# EAGLE board mcu (EAGLE 9.4.2)
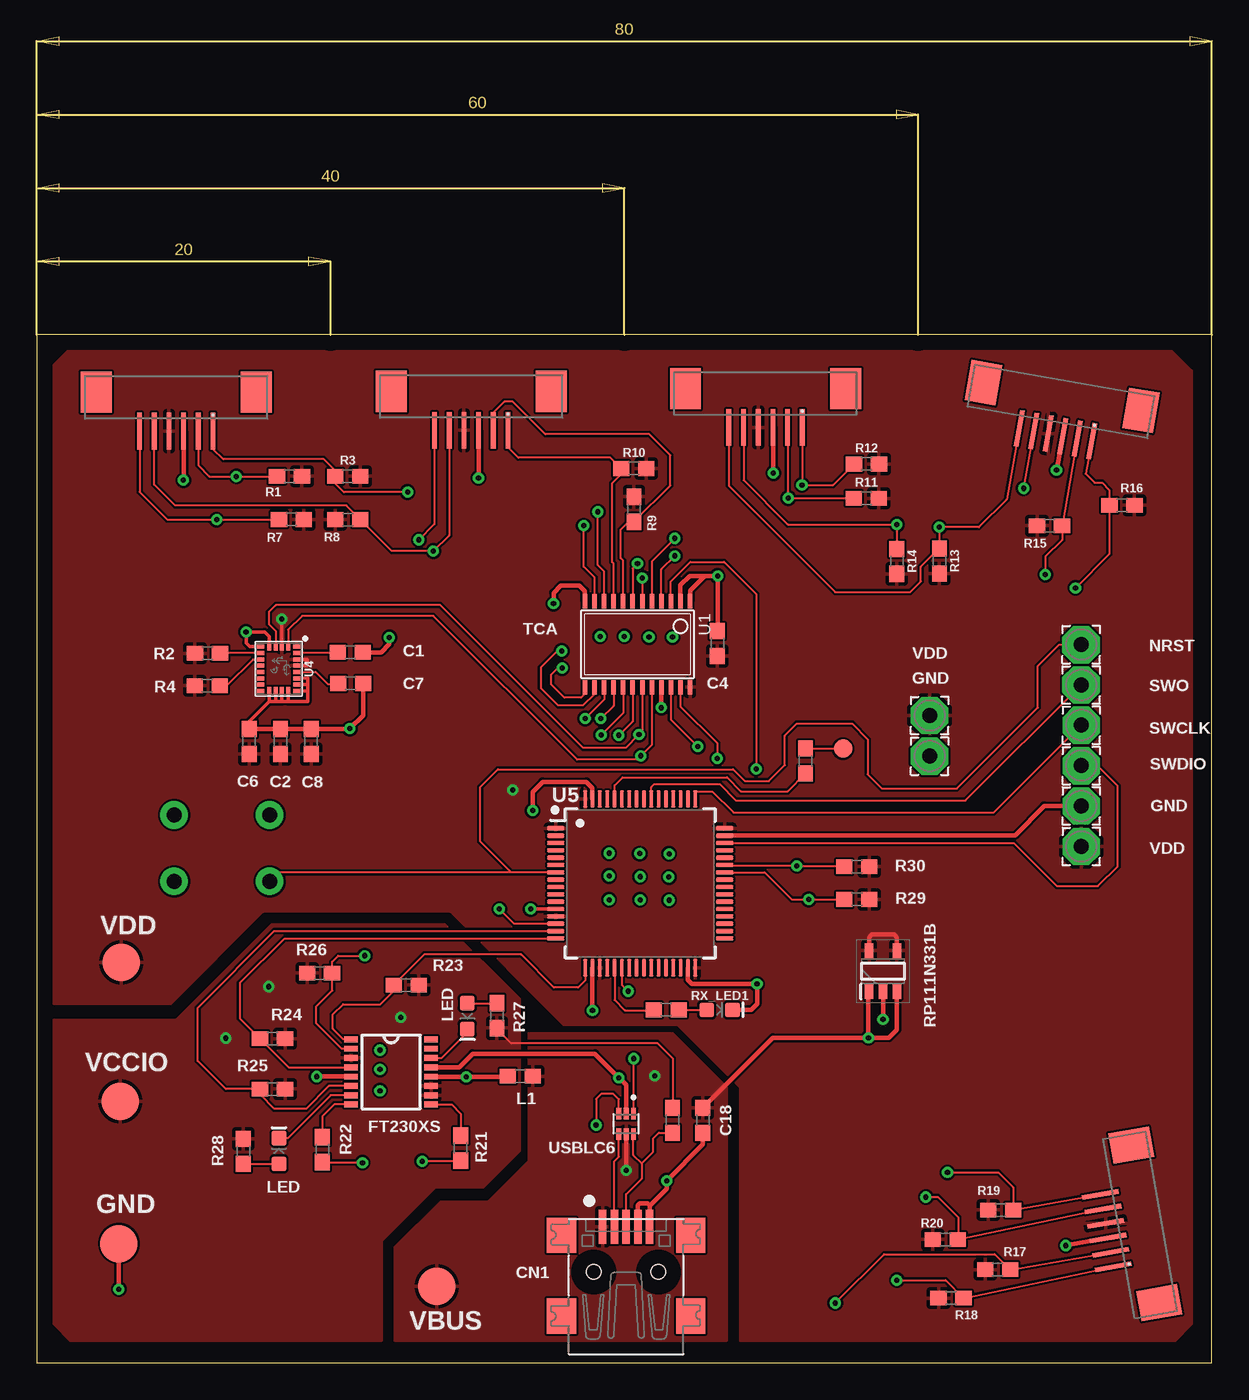
[diagram p0: board, top side]
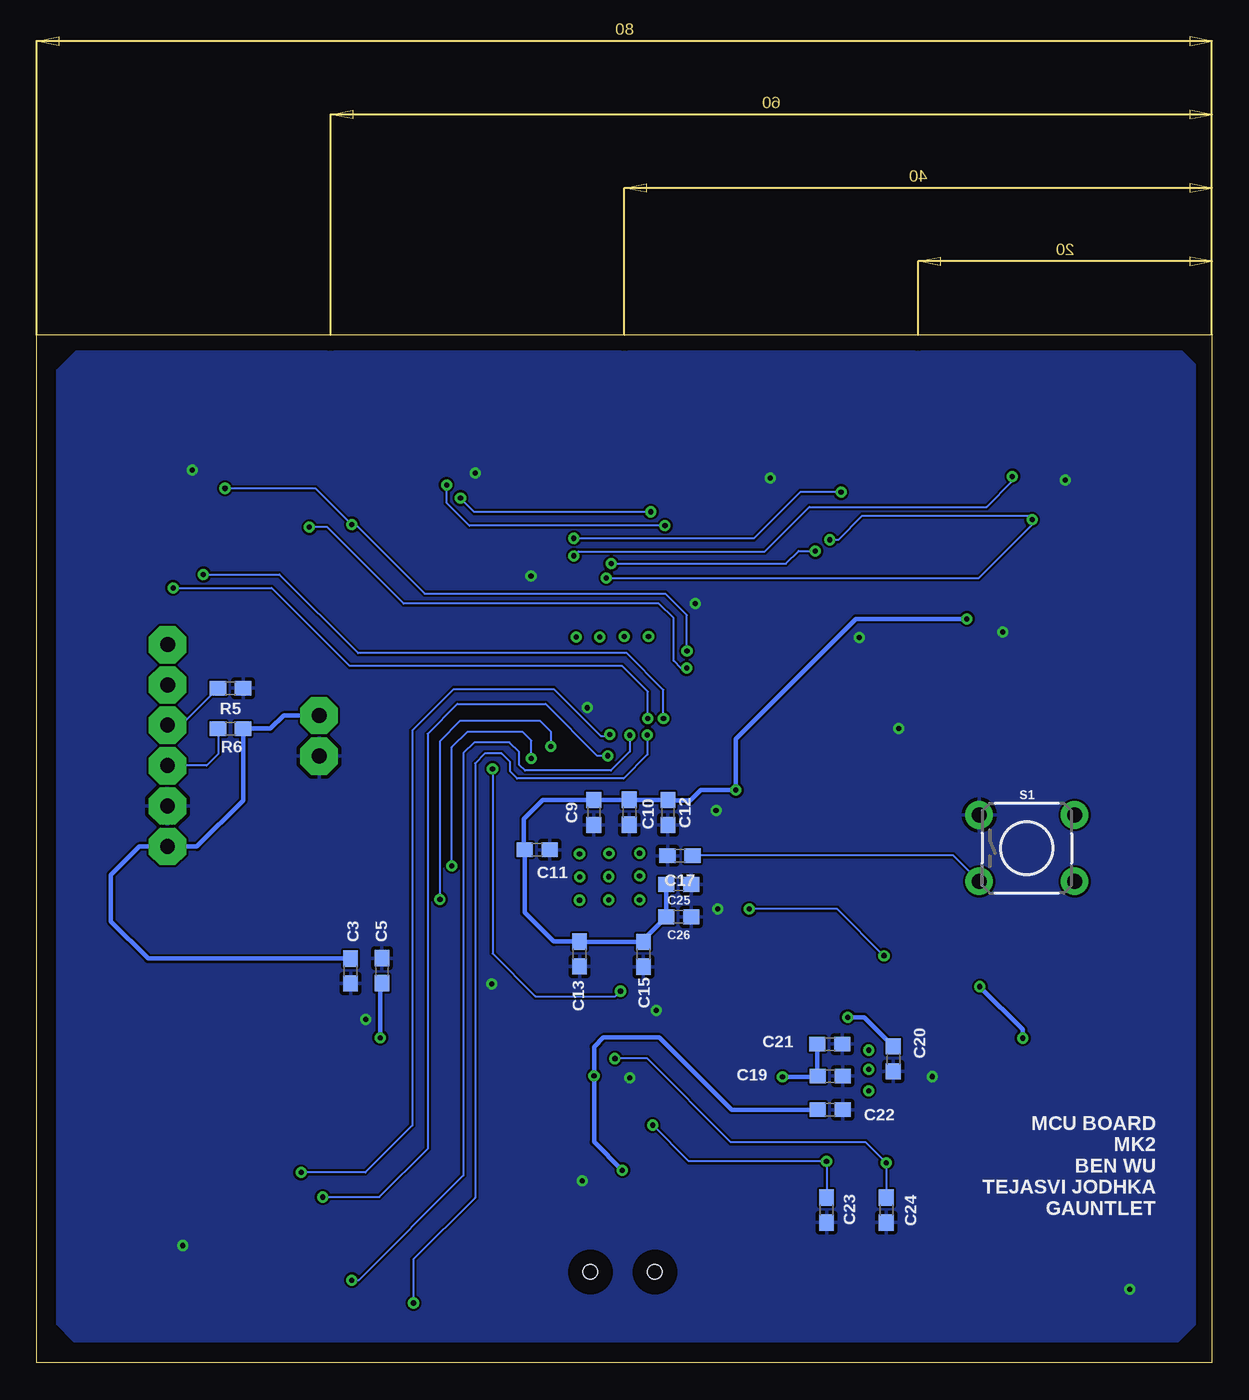
[diagram p1: board, bottom side, seen from below]

Size 80 x 70 mm. Coordinates in mm from the lower left corner, seen from the top.
Outline: 0,0 80,0 80,70 0,70 0,0
Copper layers (1*16): Top 0.035mm / dielectric 1.5mm / Bottom 0.035mm
Design rules "default": minimum track width 6mil, minimum drill 0.35mm, track to track 6mil, track to pad 6mil, pad to pad 6mil, via to via 6mil, smd to smd 6mil, copper to edge 40mil, drill to drill 6mil, minimum pad ring 10mil, minimum via ring 8mil, stop-mask expansion 4mil, vias tented up to drill 0mil, thermal gap 10mil

## Footprints (pad centres in the part's own frame; a part is rotated, then mirrored left to right if it is on the bottom)
0603 = smd 1.1 x 1: 1 -0.85,0; 2 0.85,0
USB-MINIB = smd 0.5 x 2.308: D+ 0,4.064; D- -0.8,4.064; GND 1.6,4.064; ID 0.8,4.064; VBUS -1.6,4.064 | smd 2 x 2.4: GND1 -4.4,-2; GND2 -4.4,3.5; GND3 4.4,3.5; GND4 4.4,-2 | hole 1: -2.2,1; 2.2,1
B2,54 = smd 2.54 x 2.54: TP 0,0
SOT95P280X120-5N = smd 1 x 0.6: 1 -1.4,0.95; 2 -1.4,0; 3 -1.4,-0.95; 4 1.4,-0.95; 5 1.4,0.95
SSOP16 = smd 0.914 x 0.406: 1 -2.718,2.223; 2 -2.718,1.587; 3 -2.718,0.953; 4 -2.718,0.318; 5 -2.718,-0.318; 6 -2.718,-0.953; 7 -2.718,-1.587; 8 -2.718,-2.223; 9 2.718,-2.223; 10 2.718,-1.587; 11 2.718,-0.953; 12 2.718,-0.318; 13 2.718,0.318; 14 2.718,0.953; 15 2.718,1.587; 16 2.718,2.223
2,54/1,0 = drill 1.016 pad 2.54 octagon: 1 0,0
LED-0603 = smd 1 x 1: A -0.877,0; C 0.877,0
TACTILE_SWITCH_PTH_6.0MM = drill 1.016 pad 1.88: 1 -3.251,2.261; 2 3.251,2.261; 3 -3.251,-2.261; 4 3.251,-2.261
B1,27 = smd 1.27 x 1.27: TP 0,0
TSSOP24 = smd 0.305 x 0.991: 1 -3.575,-2.918; 2 -2.925,-2.918; 3 -2.275,-2.918; 4 -1.625,-2.918; 5 -0.975,-2.918; 6 -0.325,-2.918; 7 0.325,-2.918; 8 0.975,-2.918; 9 1.625,-2.918; 10 2.275,-2.918; 11 2.925,-2.918; 12 3.575,-2.918; 13 3.575,2.918; 14 2.925,2.918; 15 2.275,2.918; 16 1.625,2.918; 17 0.975,2.918; 18 0.325,2.918; 19 -0.325,2.918; 20 -0.975,2.918; 21 -1.625,2.918; 22 -2.275,2.918; 23 -2.925,2.918; 24 -3.575,2.918
SOT50P160X60-6N = smd 0.75 x 0.35: 1 -0.69,0.5; 2 -0.69,0; 3 -0.69,-0.5; 4 0.69,-0.5; 5 0.69,0; 6 0.69,0.5
LGA-24-3.5X3 = smd 0.27 x 0.45: 1 -1.505,1.225; 6 -1.505,-1.225; 7 -1.075,-1.225; 8 -0.645,-1.225; 9 -0.215,-1.225; 10 0.215,-1.225; 11 0.645,-1.225; 12 1.075,-1.225; 13 1.505,-1.225; 18 1.505,1.225; 19 1.075,1.225; 20 0.645,1.225; 21 0.215,1.225; 22 -0.215,1.225; 23 -0.645,1.225; 24 -1.075,1.225 | smd 0.45 x 0.27: 2 -1.475,0.645; 3 -1.475,0.215; 4 -1.475,-0.215; 5 -1.475,-0.645; 14 1.475,-0.645; 15 1.475,-0.215; 16 1.475,0.215; 17 1.475,0.645
LQFP-64 = smd 1.2 x 0.3: 1 -5.75,3.75; 2 -5.75,3.25; 3 -5.75,2.75; 4 -5.75,2.25; 5 -5.75,1.75; 6 -5.75,1.25; 7 -5.75,0.75; 8 -5.75,0.25; 9 -5.75,-0.25; 10 -5.75,-0.75; 11 -5.75,-1.25; 12 -5.75,-1.75; 13 -5.75,-2.25; 14 -5.75,-2.75; 15 -5.75,-3.25; 16 -5.75,-3.75; 33 5.75,-3.75; 34 5.75,-3.25; 35 5.75,-2.75; 36 5.75,-2.25; 37 5.75,-1.75; 38 5.75,-1.25; 39 5.75,-0.75; 40 5.75,-0.25; 41 5.75,0.25; 42 5.75,0.75; 43 5.75,1.25; 44 5.75,1.75; 45 5.75,2.25; 46 5.75,2.75; 47 5.75,3.25; 48 5.75,3.75 | smd 0.3 x 1.2: 17 -3.75,-5.75; 18 -3.25,-5.75; 19 -2.75,-5.75; 20 -2.25,-5.75; 21 -1.75,-5.75; 22 -1.25,-5.75; 23 -0.75,-5.75; 24 -0.25,-5.75; 25 0.25,-5.75; 26 0.75,-5.75; 27 1.25,-5.75; 28 1.75,-5.75; 29 2.25,-5.75; 30 2.75,-5.75; 31 3.25,-5.75; 32 3.75,-5.75; 49 3.75,5.75; 50 3.25,5.75; 51 2.75,5.75; 52 2.25,5.75; 53 1.75,5.75; 54 1.25,5.75; 55 0.75,5.75; 56 0.25,5.75; 57 -0.25,5.75; 58 -0.75,5.75; 59 -1.25,5.75; 60 -1.75,5.75; 61 -2.25,5.75; 62 -2.75,5.75; 63 -3.25,5.75; 64 -3.75,5.75
MOLEX6_1MM = smd 0.32 x 2.5: 1 0,1.2; 2 1,1.2; 3 2,1.2; 4 3,1.2; 5 4,1.2; 6 5,1.2 | smd 2.1 x 2.8: P$7 -2.95,-1.45; P$8 7.95,-1.45

## Placement (x,y rotation side)
C1  0.1uF  [0603]  21.34,48.38 0 top
C2  0.1uF  [0603]  16.59,42.31 90 top
C3  1.0uF  [0603]  58.64,26.67 270 bottom
C4  10uF  [0603]  46.32,48.99 270 top
C5  1.0uF  [0603]  56.5,26.7 90 bottom
C6  0.1uF  [0603]  14.47,42.31 90 top
C7  10nF  [0603]  21.37,46.25 0 top
C8  10uF  [0603]  18.69,42.31 90 top
C9  0.1uF  [0603]  42.08,37.48 270 bottom
C10  4.7uF  [0603]  39.67,37.49 270 bottom
C11  0.1uF  [0603]  45.94,34.93 0 bottom
C12  0.1uF  [0603]  37.03,37.47 270 bottom
C13  0.1uF  [0603]  43.04,27.83 270 bottom
C15  0.1uF  [0603]  38.7,27.82 270 bottom
C17  0.1uF  [0603]  36.21,34.53 180 bottom
C18  0.1uF  [0603]  45.33,16.51 270 top
C19  4.7uF  [0603]  25.98,19.52 0 bottom
C20  0.1uF  [0603]  21.69,20.69 270 bottom
C21  0.1uF  [0603]  26.01,21.71 0 bottom
C22  10nF  [0603]  25.98,17.24 0 bottom
C23  47pF  [0603]  26.24,10.4 270 bottom
C24  47pF  [0603]  22.17,10.4 270 bottom
C25  10nF  [0603]  36.3,32.57 0 bottom
C26  1.0uF  [0603]  36.3,30.36 0 bottom
CN1  [USB-MINIB]  40.12,5.19 0 top
GND  TPB2,54  [B2,54]  5.59,8.11 0 top
IC1  RP111N331B-TR-FE  [SOT95P280X120-5N]  57.61,26.67 90 top
IC2  FT230XS  [SSOP16]  24.12,19.8 0 top
MI0603K300R-10  30Ω/1.8A  [0603]  32.92,19.51 0 top
PAD1  WIREPAD2,54/1,0  [2,54/1,0]  71.1,40.66 0 top
PAD2  WIREPAD2,54/1,0  [2,54/1,0]  71.1,43.42 0 top
PAD3  WIREPAD2,54/1,0  [2,54/1,0]  71.1,35.15 0 top
PAD4  WIREPAD2,54/1,0  [2,54/1,0]  71.1,37.91 0 top
PAD5  WIREPAD2,54/1,0  [2,54/1,0]  71.09,46.16 0 top
PAD6  WIREPAD2,54/1,0  [2,54/1,0]  60.78,41.31 0 top
PAD7  WIREPAD2,54/1,0  [2,54/1,0]  71.09,48.9 0 top
PAD8  WIREPAD2,54/1,0  [2,54/1,0]  60.78,44.08 0 top
R1  4.7k  [0603]  17.21,60.37 0 top
R2  10k  [0603]  11.62,48.31 180 top
R3  4.7k  [0603]  21.17,60.37 0 top
R4  10k  [0603]  11.6,46.11 180 top
R5  10k  [0603]  66.81,45.94 180 bottom
R6  10k  [0603]  66.81,43.18 0 bottom
R7  4.7k  [0603]  17.34,57.42 0 top
R8  4.7k  [0603]  21.18,57.42 180 top
R9  4.7k  [0603]  40.65,58.12 90 top
R10  4.7k  [0603]  40.65,60.89 0 top
R11  4.7k  [0603]  56.47,58.87 0 top
R12  4.7k  [0603]  56.48,61.2 0 top
R13  4.7k  [0603]  61.45,54.6 270 top
R14  4.7k  [0603]  58.54,54.57 270 top
R15  4.7k  [0603]  68.94,57 180 top
R16  4.7k  [0603]  73.87,58.4 0 top
R17  4.7k  [0603]  65.41,6.34 180 top
R18  4.7k  [0603]  62.24,4.4 180 top
R19  4.7k  [0603]  65.61,10.41 180 top
R20  4.7k  [0603]  61.85,8.4 180 top
R21  27R  [0603]  28.87,14.62 90 top
R22  27R  [0603]  19.44,14.51 270 top
R23  10k  [0603]  25.15,25.72 0 top
R24  10k  [0603]  16.05,22.07 0 top
R25  10k  [0603]  16.05,18.64 0 top
R26  10k  [0603]  19.25,26.54 180 top
R27  270R  [0603]  31.33,23.64 90 top
R28  270R  [0603]  14.06,14.4 270 top
R29  10k  [0603]  55.83,31.55 0 top
R30  10k  [0603]  55.83,33.79 0 top
R32  270R  [0603]  42.85,24.04 0 top
R33  1.5k  [0603]  43.28,16.52 90 top
R34  10k  [0603]  52.32,40.98 90 top
RX_LED  GREEN  [LED-0603]  16.49,14.42 90 top
RX_LED1  GREEN  [LED-0603]  46.48,24.04 0 top
S1  MOMENTARY-SWITCH-SPST-PTH-6.0MM  [TACTILE_SWITCH_PTH_6.0MM]  12.6,35.04 0 bottom
TP1  TPB1,27  [B1,27]  54.89,41.82 0 top
TX_LED  GREEN  [LED-0603]  29.31,23.61 270 top
U1  TCA9548APWR  [TSSOP24]  40.9,48.93 180 top
U2  USBLC6-2P6  [SOT50P160X60-6N]  40.12,16.27 270 top
U4  LSM9DS1  [LGA-24-3.5X3]  16.47,47.26 270 top
U5  STM32L452RECT6  [LQFP-64]  41.08,32.65 0 top
U$1  [MOLEX6_1MM]  12,64.64 180 top
U$2  [MOLEX6_1MM]  32.08,64.7 180 top
U$3  [MOLEX6_1MM]  52.11,64.9 180 top
U$4  [MOLEX6_1MM]  72.02,63.94 170 top
U$5  [MOLEX6_1MM]  74.46,6.74 100 top
VBUS  TPB2,54  [B2,54]  27.23,5.21 0 top
VCCIO  TPB2,54  [B2,54]  5.69,17.79 0 top
VDD  TPB2,54  [B2,54]  5.77,27.26 0 top

## Library data of the parts
C1 C2 C6 C9 C11-C13 C15 C17 C18 C20 C21 = SparkFun-Capacitors; PROD_ID: CAP-00810
C3 C5 C26 = SparkFun-Capacitors; PROD_ID: CAP-13930
C4 C8 = SparkFun-Capacitors; PROD_ID: CAP-11015
C7 C22 C25 = SparkFun-Capacitors; PROD_ID: CAP-00867
C10 C19 = SparkFun-Capacitors; PROD_ID: CAP-08280
C23 C24 = SparkFun-Capacitors; PROD_ID: CAP-08913
CN1 = adafruit
GND TP1 VBUS VCCIO VDD = testpad
IC1 = SamacSys_Parts; DESCRIPTION: LDO Voltage Regulators Low voltage Fast response Regulator; HEIGHT: 1.2mm; MANUFACTURER_NAME: Ricoh Electronic Devices Company; MANUFACTURER_PART_NUMBER: RP111N331B-TR-FE
IC2 = ftdichip
MI0603K300R-10 = SparkFun-Coils; PROD_ID: NDUC-13805
PAD1-PAD8 = wirepad
R1 R3 R7-R22 R27 R28 R32 = SparkFun-Resistors; PROD_ID: RES-07857
R2 R4-R6 R23-R26 R29 R30 R34 = SparkFun-Resistors; PROD_ID: RES-00824
R33 = SparkFun-Resistors; PROD_ID: RES-08306
RX_LED RX_LED1 TX_LED = SparkFun-LED; PROD_ID: DIO-00821
S1 = SparkFun-Switches; PROD_ID: SWCH-08441; SF_SKU: COM-00097
U1 = microbuilder
U2 = USBLC6-2P6; AVAILABILITY: Unavailable; DESCRIPTION: USBLC6 Series 2 Line 6 V SMT Bi Directional ESD Protection - SOT-666; MF: STMicroelectronics; MP: USBLC6-2P6; PACKAGE: SOT-563 STMicroelectronics; PRICE: None
U4 = SparkFun-Sensors; PROD_ID: IC-12536
U5 = STM32; FLASH: 256KB; MFPN: STM32L476RCT6
U$1-U$5 = custom

## Nets
BOOT0: R34.1 U5.60
C1: C1.1 U4.24
CAP: C7.1 U4.21
CBUS1: IC2.14 TX_LED.C
CBUS2: IC2.7 RX_LED.C
CS_A/G: R2.1 U4.7
CS_M: R4.1 U4.8
CTS: IC2.6 R25.1 U5.15
D+: CN1.D+ R33.1 U2.6
D-: CN1.D- U2.4
GND: C1.2 C2.2 C3.2 C4.1 C5.2 C6.2 C7.2 C8.2 C9.2 C10.2 C11.2 C12.2 C13.2 C15.2 C17.2 C18.2 C19.2 C20.2 C21.2 C22.2 C23.2 C24.2 C25.2 C26.2 CN1.GND CN1.ID GND.TP IC1.2 IC2.5 IC2.13 PAD4.1 PAD6.1 R5.1 RX_LED1.C S1.1 U1.1 U1.2 U1.12 U1.21 U2.2 U4.5 U4.6 U4.14 U4.15 U4.16 U4.17 U4.18 U4.19 U4.20 U5.12 U5.18 U5.31 U5.47 U5.63 U$1.3 U$2.3 U$3.3 U$4.3 U$5.3
I2C_MUX_RST: U1.3 U5.22
I2C_SCLK: R29.1 U1.22 U5.42
I2C_SDA: R30.1 U1.23 U5.43
N$8: R27.2 TX_LED.A
N$10: R28.2 RX_LED.A
N$19: R32.2 RX_LED1.A
N$20: R34.2 TP1.TP
NRST: C17.1 PAD7.1 S1.3 U5.7
PA5: R32.1 U5.21
RTS: IC2.2 R26.1 U5.14
RXD: IC2.4 R24.1 U5.16
SCL0: R3.1 U1.5 U$1.1
SCL1: R8.1 U1.7 U$1.5 U$2.5
SCL2: R10.1 U1.9 U$2.1
SCL3: R12.1 U1.11 U$3.1
SCL4: R14.1 U1.14 U$3.5 U$4.5
SCL5: R16.1 U1.16 U$4.1
SCL6: R18.1 U1.18 U$5.1
SCL7: R20.1 U1.20 U4.2 U$5.5
SDA0: R1.1 U1.4 U$1.2
SDA1: R7.1 U1.6 U$1.6 U$2.6
SDA2: R9.1 U1.8 U$2.2
SDA3: R11.1 U1.10 U$3.2
SDA4: R13.1 U1.13 U$3.6 U$4.6
SDA5: R15.1 U1.15 U$4.2
SDA6: R17.1 U1.17 U$5.2
SDA7: R19.1 U1.19 U4.4 U$5.6
SWCLK: PAD2.1 R5.2 U5.49
SWDIO: PAD1.1 R6.1 U5.46
SWO: PAD5.1 U5.55
TXD: IC2.1 R23.1 U5.17
USB_D+: C24.1 R22.2 U2.1
USB_D-: C23.1 R21.1 U2.3
USBDM: IC2.9 R21.2
USBDP: IC2.8 R22.1
VBUS: C5.1 C18.1 C22.1 CN1.VBUS IC1.1 IC1.3 MI0603K300R-10.2 U2.5 VBUS.TP
VCC_USB: C19.1 C21.1 IC2.12 MI0603K300R-10.1
VCCIO: C20.1 IC2.3 IC2.10 IC2.11 R23.2 R24.2 R25.2 R26.2 R27.1 R28.1 R33.2 VCCIO.TP
VDD: C2.1 C3.1 C4.2 C6.1 C8.1 C9.1 C10.1 C11.1 C12.1 C13.1 C15.1 C25.1 C26.1 IC1.4 IC1.5 PAD3.1 PAD8.1 R1.2 R2.2 R3.2 R4.2 R6.2 R7.2 R8.2 R9.2 R10.2 R11.2 R12.2 R13.2 R14.2 R15.2 R16.2 R17.2 R18.2 R19.2 R20.2 R29.2 R30.2 U1.24 U4.1 U4.3 U4.22 U4.23 U5.1 U5.13 U5.19 U5.32 U5.48 U5.64 U$1.4 U$2.4 U$3.4 U$4.4 U$5.4 VDD.TP

## Tracks (layer width: path | path; a pad name or v marks a point on that pad's centre or on a via)
BOOT0
  Top 0.152: U5.60 39.33,39.31 39.88,39.86 46.99,39.86 47.93,38.92 51.12,38.92 R34.1
C1
  Top 0.152: U4.24 17.74,48.38 C1.1
CAP
  Top 0.152: U4.21 18.98,47.04 19.81,46.21 20.48,46.21 C7.1
CBUS1
  Top 0.152: IC2.14 27.57,20.76 29.31,22.5 TX_LED.C
CBUS2
  Top 0.152: IC2.7 20.01,18.22 17.09,15.3 RX_LED.C
CS_A/G
  Top 0.152: R2.1 12.51,48.35 15.23,48.35 U4.7
CS_M
  Top 0.152: R4.1 12.93,46.11 14.72,47.9 U4.8
CTS
  Top 0.152: IC2.6 19.89,18.85 18.34,17.3 16.18,17.3 15.2,18.28 R25.1 12.87,18.64 10.95,20.56 10.95,24.16 16.18,29.4 U5.15
D+
  Top 0.152: CN1.D+ 40.12,11.48 41.17,12.53 41.17,13.57 | 41.17,13.57 40.62,14.13 U2.6 | 41.17,13.57 41.96,14.36 41.96,15.27 42.35,15.67 R33.1
D-
  Top 0.152: CN1.D- 39.32,13.72 39.62,14.03 U2.4
GND  (via drill 0.35)
  Top 0.152: v21.31,43.19 21.29,43.16 | C8.2 | C2.2 16.69,43.16 | C6.2 | 17.71,45.74 U4.18 | U4.19 17.71,46.2 | U4.20 17.71,46.62 | C1.2 22.22,48.35 | U4.16 | U4.15 16.27,45.77 | 15.81,45.77 U4.14 | U4.5 15.82,48.74 | U1.1 | 10,60.12 v9.98,60.1 | v30.08,60.26 v30.07,60.26 | U$3.3 50.14,63.67 | 46.35,49.87 C4.1 | 69.83,63.09 U$4.3 | 37.85,26.88 U5.18 | v57.61,23.38 | v19.05,19.49 | v42.52,44.61
  Top 0.254: U4.6 14.52,48.76 14.25,49.03 v14.25,49.77 15.52,49.77 15.83,49.46 U4.5 | 14.47,43.56 C6.2 14.47,43.67 15.82,45.02 | U4.14 15.82,45.02 | 15.82,45.02 16.25,45.02 | U4.15 16.25,45.02 | U4.16 16.69,45.02 | 17.12,45.02 16.69,45.02 | 17.12,45.02 18.44,45.02 18.44,45.75 | U4.17 17.12,45.02 | 16.25,45.02 16.69,45.02 | U4.20 18.44,46.62 18.44,46.18 | U4.20 | U4.19 | 18.44,46.18 U4.19 | 18.44,45.75 U4.18 | U4.18 | 18.44,46.18 18.44,45.75 | v33.63,30.89 U5.12
  Top 0.305: v21.31,43.19 22.22,44.09 C7.2 | 21.29,43.16 C8.2 | C8.2 16.69,43.16 | v24,49.38 24,48.93 23.45,48.38 C1.2 | v46.35,53.58 44.45,53.58 43.82,52.95 U1.2 | v46.35,53.58 45.47,53.58 44.47,52.58 U1.1 | U$1.3 10,60.12 | U1.21 v42.52,44.61 | U$2.3 v30.08,60.26 | 50.14,63.67 v50.14,60.59 | U1.12 37.32,52.55 36.93,52.94 35.69,52.94 35.18,52.43 v35.18,51.7 | v46.35,53.58 46.35,49.87 | U5.47 46.86,35.92 66.59,35.92 68.58,37.91 68.58,37.93 71.08,37.93 PAD4.1 | C6.2 16.69,43.16 | IC1.2 v57.61,23.38 | CN1.ID | U2.2 40.12,18.91 v39.62,19.41 38,21.04 29.67,21.04 28.75,20.12 IC2.13 | IC2.5 v19.05,19.49 | v5.59,5.01 GND.TP | v70.05,7.98 U$5.3 | U$4.3 v69.42,60.79 | U5.18 v37.83,23.98 | CN1.ID 40.92,10.73 41.05,10.85 41.58,10.85 41.73,10.7 | 41.73,10.7 41.73,9.27 CN1.GND | 41.73,10.7 42.88,11.84 v42.88,12.4 45.33,14.86 C18.2 | U5.31 44.33,26.06 44.6,25.79 v49.03,25.79 49.03,24.43 48.64,24.04 RX_LED1.C | v33.76,37.6 33.76,38.87 34.44,39.55 37.41,39.55 37.83,39.14 U5.63
  pour Bottom: 1.14,67.98 2.13,68.97 77.24,68.97 78.64,67.57 78.64,2.65 77.47,1.48 2.29,1.48 1.14,2.62
I2C_MUX_RST  (via drill 0.35)
  Top 0.152: U5.22 39.83,25.73 v40.26,25.31 | U1.3 43.17,53.21 44.5,54.54 46.79,54.54 48.97,52.36 v48.97,40.44
  Bottom 0.152: v40.26,25.31 40.62,24.95 46.05,24.95 48.97,27.87 v48.97,40.44
I2C_SCLK  (via drill 0.35)
  Top 0.152: U1.22 43.17,43.81 v45.01,41.97 | U5.42 49.54,33.4 51.38,31.55 v52.55,31.55 R29.1
  Bottom 0.152: v45.01,41.97 45.01,42.98 45.74,43.72 51.16,43.72 52.55,42.32 v52.55,31.55
I2C_SDA  (via drill 0.35)
  Top 0.152: U1.23 43.82,44.71 46.33,42.2 v46.33,41.16 | U5.43 46.86,33.87 51.71,33.87 v51.74,33.84 54.93,33.84 R30.1
  Bottom 0.152: v46.33,41.16 46.33,42.38 46.94,42.98 50.67,42.98 51.74,41.92 v51.74,33.84
N$1  (via drill 0.35)
  other vias: 38.96,34.7
N$2  (via drill 0.35)
  other vias: 41.05,34.68
N$3  (via drill 0.35)
  other vias: 38.96,31.53
N$4  (via drill 0.35)
  other vias: 41.07,31.53
N$5  (via drill 0.35)
  other vias: 43.05,34.65
N$6  (via drill 0.35)
  other vias: 43.05,31.5
N$7  (via drill 0.35)
  other vias: 41.07,33.1
N$8
  Top 0.152: R27.2 TX_LED.A
N$9  (via drill 0.35)
  other vias: 38.96,33.15
N$10
  Top 0.152: R28.2 RX_LED.A
N$11  (via drill 0.35)
  other vias: 43.03,33.08
N$12  (via drill 0.35)
  other vias: 38.35,49.46
N$13  (via drill 0.35)
  other vias: 41.68,49.41
N$14  (via drill 0.35)
  other vias: 40.01,49.46
N$15  (via drill 0.35)
  other vias: 43.28,49.41
N$16  (via drill 0.35)
  other vias: 23.37,21.29
N$17  (via drill 0.35)
  other vias: 23.37,19.97
N$18  (via drill 0.35)
  other vias: 23.37,18.52
N$19
  Top 0.152: R32.2 RX_LED1.A
N$20
  Top 0.152: R34.2 54.88,41.83 TP1.TP
NRST
  Top 0.152: S1.3 16.47,33.4 U5.7 32.3,33.4 30.2,35.49 30.2,39.23 31.39,40.42 47.4,40.42 48.21,39.61 49.84,39.61 50.93,40.7 50.93,42.7 51.74,43.52 55.5,43.52 56.57,42.45 56.57,40.06 57.53,39.1 62.64,39.1 68.15,44.61 68.15,47.45 69.6,48.9 PAD7.1
  Bottom 0.152: S1.3 17.61,34.53 C17.1
PA5
  Top 0.152: U5.21 39.33,24.71 40.03,24.01 41.97,24.01 R32.1
RTS  (via drill 0.35)
  Top 0.152: IC2.2 20.75,21.39 19.04,23.1 19.04,24.28 20.12,25.36 20.12,26.52 R26.1 20.1,27.3 20.52,27.72 v22.33,27.72 | U5.14 32.49,29.9 v31.5,30.89
  Bottom 0.152: v22.33,27.72 25.5,30.89 v31.5,30.89
RXD
  Top 0.152: IC2.4 17.15,20.12 R24.1 13.83,23.44 13.83,25.85 16.87,28.9 U5.16
SCL0  (via drill 0.35)
  Top 0.152: U$1.1 12,62.23 12.7,61.53 19.54,61.53 20.32,60.75 R3.1 20.32,59.88 20.9,59.29 v25.25,59.29 | v43.43,56.14 41.87,54.58 U1.5
  Bottom 0.152: v43.43,56.14 31.19,56.14 28.04,59.29 v25.25,59.29
SCL1  (via drill 0.35)
  Top 0.152: U$2.5 28.07,63.49 28.07,56.34 v27,55.28 24.17,55.28 R8.1 21.07,58.38 9.42,58.38 8,59.8 U$1.5 | v40.89,54.41 40.57,54.09 U1.7
  Bottom 0.152: v40.89,54.41 29.01,54.41 28.14,55.28 v27,55.28
SCL2
  Top 0.152: U1.9 39.27,54.41 39.17,54.52 39.17,59.9 39.8,60.53 R10.1 39.06,61.63 32.79,61.63 32.08,62.34 U$2.1
SCL3  (via drill 0.35)
  Top 0.152: U1.11 37.97,53.48 37.24,54.21 v37.24,57 | U$3.1 52.11,59.79 v52.09,59.77 54.2,59.77 R12.1
  Bottom 0.152: v52.09,59.77 52.09,58.56 50.54,57 v37.24,57
SCL4  (via drill 0.35)
  Top 0.152: U1.14 37.97,45.55 37.19,44.76 35.51,44.76 34.31,45.96 34.31,47.35 35.43,48.47 v35.74,48.47 | R14.1 v58.55,57.08 51.14,57.08 48.11,60.11 U$3.5 | U$4.5 arc18 67.89,63.47 v67.18,59.55
  Bottom 0.152: v35.74,48.47 35.74,50.91 37.21,52.38 53.59,52.38 58.29,57.08 v58.55,57.08 61.01,59.55 v67.18,59.55
SCL5  (via drill 0.35)
  Top 0.152: U1.16 39.27,44.74 v38.41,43.87 | U$4.1 71.4,60.54 72.01,59.93 72.52,59.93 73.02,59.42 R16.1 73.02,55.07 v70.71,52.76
  Bottom 0.152: v38.41,43.87 38.41,45.7 40.16,47.45 58.7,47.45 64.01,52.76 v70.71,52.76
SCL6  (via drill 0.35)
  Top 0.152: U1.18 40.57,43.68 v39.62,42.73 | U$5.1 R18.1 61.87,5.62 v58.55,5.62
  Bottom 0.152: v39.62,42.73 39.62,41.61 40.92,40.32 46.76,40.32 47.17,40.72 47.17,41.59 47.83,42.25 50.22,42.25 50.95,41.51 50.95,12.76 58.09,5.62 v58.55,5.62
SCL7  (via drill 0.35)
  Top 0.152: U1.20 41.87,42.08 v41.12,41.33 40.87,41.08 36.78,41.08 27,50.86 18.06,50.86 17.12,49.92 U4.2 | U$5.5 R20.1 62.71,8.41 62.71,9.91 61.34,11.29 v60.53,11.29
  Bottom 0.152: v41.12,41.33 41.83,41.33 45.36,44.86 51.36,44.86 53.39,42.83 53.39,14.56 56.67,11.29 v60.53,11.29
SDA0  (via drill 0.35)
  Top 0.152: U$1.2 11,61.12 11.76,60.36 v13.59,60.36 16.35,60.36 R1.1 | U1.4 42.52,54.03 v43.43,54.95
  Bottom 0.152: v43.43,54.95 43.13,55.25 30.43,55.25 27.41,58.28 15.34,58.28 13.59,60.03 v13.59,60.36
SDA1  (via drill 0.35)
  Top 0.152: v26.01,56.04 27.08,57.11 U$2.6 | U1.6 v41.22,53.45 | R7.1 12.25,57.42 v12.24,57.41 8.89,57.41 7,59.3 U$1.6
  Bottom 0.152: v41.22,53.45 15.88,53.45 12.24,57.08 v12.24,57.41 12.52,57.69 23.8,57.69 25.45,56.04 v26.01,56.04
SDA2
  Top 0.152: U1.8 39.92,54.63 39.75,54.8 39.75,56.73 40.3,57.27 R9.1 43.13,59.75 43.13,61.81 41.71,63.23 34.62,63.23 32.41,65.44 31.83,65.44 31.08,64.69 U$2.2
SDA3  (via drill 0.35)
  Top 0.152: U1.10 38.62,53.89 38.2,54.31 v38.2,57.94 | U$3.2 51.11,58.93 v51.16,58.89 55.6,58.89 R11.1
  Bottom 0.152: v38.2,57.94 50.22,57.94 v51.16,58.89
SDA4  (via drill 0.35)
  Top 0.152: U1.13 37.32,45.56 37.06,45.3 35.92,45.3 35.03,46.19 35.03,46.87 35.46,47.3 v35.76,47.3 | U$3.6 47.11,59.73 54.36,52.48 59.46,52.48 60.19,53.21 60.19,54.22 61.42,55.45 R13.1 v61.44,56.9 64.14,56.9 66.02,58.78 U$4.6
  Bottom 0.152: v61.44,56.9 60.22,56.9 55.02,51.7 37.64,51.7 36.65,50.71 36.65,47.81 36.14,47.3 v35.76,47.3
SDA5  (via drill 0.35)
  Top 0.152: U1.15 38.62,45.16 v37.34,43.87 | U$4.2 R15.1 69.79,56.03 68.66,54.9 v68.66,53.68
  Bottom 0.152: v37.34,43.87 37.34,45.83 39.83,48.32 58.12,48.32 63.48,53.68 v68.66,53.68
SDA6  (via drill 0.35)
  Top 0.152: U1.17 39.92,44.25 v38.43,42.76 | U$5.2 R17.1 65.2,7.4 57.68,7.4 v54.36,4.07
  Bottom 0.152: v38.43,42.76 38.43,41.41 40.06,39.78 47.3,39.78 47.78,40.27 47.78,40.9 48.36,41.49 49.51,41.49 50.16,40.83 50.16,11.23 54.36,7.04 v54.36,4.07
SDA7  (via drill 0.35)
  Top 0.152: U4.4 16.26,49.85 15.8,50.3 15.8,51.11 16.29,51.59 27.48,51.59 37.21,41.87 40.08,41.87 v41,42.78 41.22,43.01 U1.19 | U$5.6 R19.1 66.47,10.42 66.47,11.95 65.46,12.96 v62,12.96
  Bottom 0.152: v41,42.78 41.1,42.68 41.6,42.68 44.81,45.88 51.61,45.88 54.43,43.06 54.43,16.16 57.63,12.96 v62,12.96
SWCLK
  Top 0.152: U5.49 44.83,38.9 46,38.9 47.43,37.46 65.14,37.46 PAD2.1
  Bottom 0.152: R5.2 70.17,43.42 PAD2.1
SWDIO
  Top 0.152: U5.46 66.52,35.4 69.44,32.47 72.24,32.47 73.58,33.81 73.58,39.27 72.19,40.66 PAD1.1
  Bottom 0.152: R6.1 67.66,41.44 68.44,40.66 PAD1.1
SWO
  Top 0.152: U5.55 41.83,39.2 42.04,39.4 46.48,39.4 47.6,38.28 63.22,38.28 PAD5.1
TXD
  Top 0.152: IC2.1 20.88,22.03 20.17,22.74 20.17,23.73 20.85,24.42 23.39,24.42 24.3,25.32 R23.1 26.37,27.8 32.97,27.8 35.2,25.56 36.85,25.56 37.33,26.04 U5.17
USB_D+  (via drill 0.35)
  Top 0.152: U2.1 40.62,20.69 v40.64,20.71 | R22.2 22.13,13.66 v22.17,13.62
  Bottom 0.152: C24.1 v22.17,13.62 23.57,15.02 32.74,15.02 38.46,20.73 40.62,20.73 v40.64,20.71 | C24.1
USB_D-  (via drill 0.35)
  Top 0.152: U2.3 39.62,17.94 39.24,18.32 38.43,18.32 38.08,17.96 v38.08,16.19 | v26.24,13.72 26.28,13.77 R21.1
  Bottom 0.152: C23.1 v26.24,13.72 35.61,13.72 v38.08,16.19 | C23.1
USBDM
  Top 0.152: IC2.9 28.25,17.58 28.88,16.95 28.88,15.48 R21.2
USBDP
  Top 0.152: IC2.8 20.24,17.58 19.44,16.78 R22.1
VBUS  (via drill 0.35)
  Top 0.152: v56.62,22.13 56.62,22.21 56.69,22.13 | 56.62,25.23 IC1.1
  Top 0.305: U2.5 v40.13,13.11 | 56.62,22.21 56.62,25.23 | IC1.3 58.56,22.68 58.01,22.13 56.69,22.13 | C18.1 50.1,22.13 v56.62,22.13
  Bottom 0.152: 56.62,25.74 C5.1
  Bottom 0.305: v40.13,13.11 42.06,15.04 v42.06,19.54 42.06,21.52 41.43,22.16 37.62,22.16 32.7,17.24 C22.1 | v56.62,22.13 56.62,25.74
  pour Top: 43.28,22.46 46.96,18.78 46.96,1.48 24.38,1.48 24.38,7.88 27.51,11.01 30.73,11.01 33.48,13.75 33.48,22.46
VCC_USB  (via drill 0.35)
  Top 0.152: 27.09,19.46 27.07,19.49 IC2.12 | 32.02,19.46 MI0603K300R-10.1
  Top 0.305: 27.09,19.46 v29.23,19.46 32.02,19.46
  Bottom 0.152: C19.1 26.86,19.5 26.89,19.46
  Bottom 0.305: v29.23,19.46 26.89,19.46 | C21.1 26.86,19.5
VCCIO  (via drill 0.35)
  Top 0.152: R27.1 31.33,22.73 32.28,21.77 42.24,21.77 43.28,20.73 R33.2
  Bottom 0.305: C20.1 23.68,23.53 v24.79,23.53 | v12.88,22.11 12.88,22.69 v15.8,25.61
  pour Top: 1.14,23.38 9.5,23.38 16,29.88 27.79,29.88 32.87,24.8 32.87,14.38 30.4,11.92 27.13,11.92 23.47,8.26 23.47,1.48 2.29,1.48 1.14,2.62
VDD  (via drill 0.35)
  Top 0.152: U4.3 | U4.3
  Top 0.254: U4.22 18.41,47.47 18.41,47.9 U4.23 | v16.69,50.66 U4.3
  Top 0.305: IC1.5 56.66,28.98 56.84,29.17 58.37,29.17 58.56,28.98 IC1.4
  Bottom 0.152: 38.81,28.78 C15.1
  Bottom 0.305: v16.69,50.66 24.23,50.66 32.41,42.48 v32.41,39 34.8,39 35.51,38.28 37,38.28 C12.1 39.65,38.32 C10.1 C9.1 45.55,38.33 46.84,37.04 46.84,34.98 C11.1 46.79,30.67 44.8,28.68 C13.1 C15.1 38.7,28.81 C26.1 C25.1 | C3.1 72.42,27.52 74.95,30.06 74.95,33.23 73.03,35.15 PAD3.1 69.09,35.15 65.96,38.29 R6.2 | R6.2 65.94,43.16 | PAD8.1 63.2,44.08 64.09,43.18 R6.2
  pour Top: 2.16,68.97 77.24,68.97 78.64,67.57 78.64,2.62 77.5,1.48 47.88,1.48 47.88,18.73 43.64,22.97 35.89,22.97 28.17,30.69 15.39,30.69 9.12,24.42 1.17,24.42 1.17,67.98

## Text on the board
tPlace: TCA | VDD | NRST | GND | SWO | SWCLK | SWDIO | GND | VDD | R30 | R29 | R26 | R23 | R24 | LED | RP111N331B | R25 | L1 | FT230XS | USBLC6 | LED
bPlace: MCU BOARD / MK2 / BEN WU / TEJASVI JODHKA / GAUNTLET